# Altium PCB Quadcopter_FC.PcbDoc
Units mil, origin at the board's own origin, x right, y up, seen from the top; angles counter-clockwise.
Board outline 2052.28 x 989.83 mil, 4 copper layers (Top Layer, GND, POWER, Bottom Layer), stack 10.237 mil thick; 90 components, 54 nets, 269 pads, 186 vias.
Unrouted connection lines stored in the file: 79.
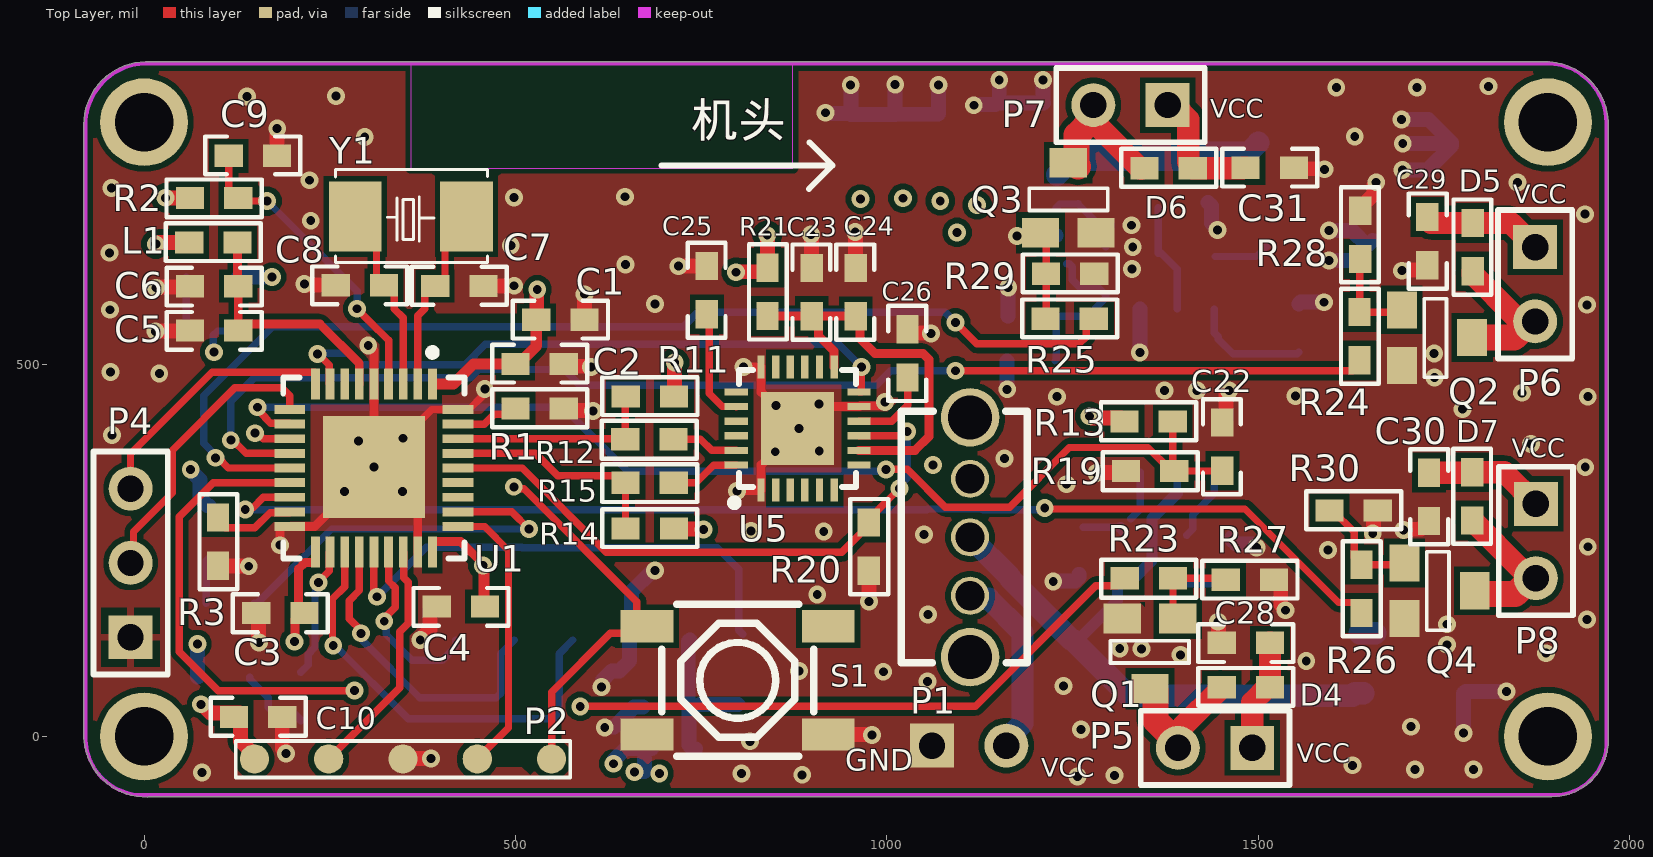
[diagram p0: Top Layer view]
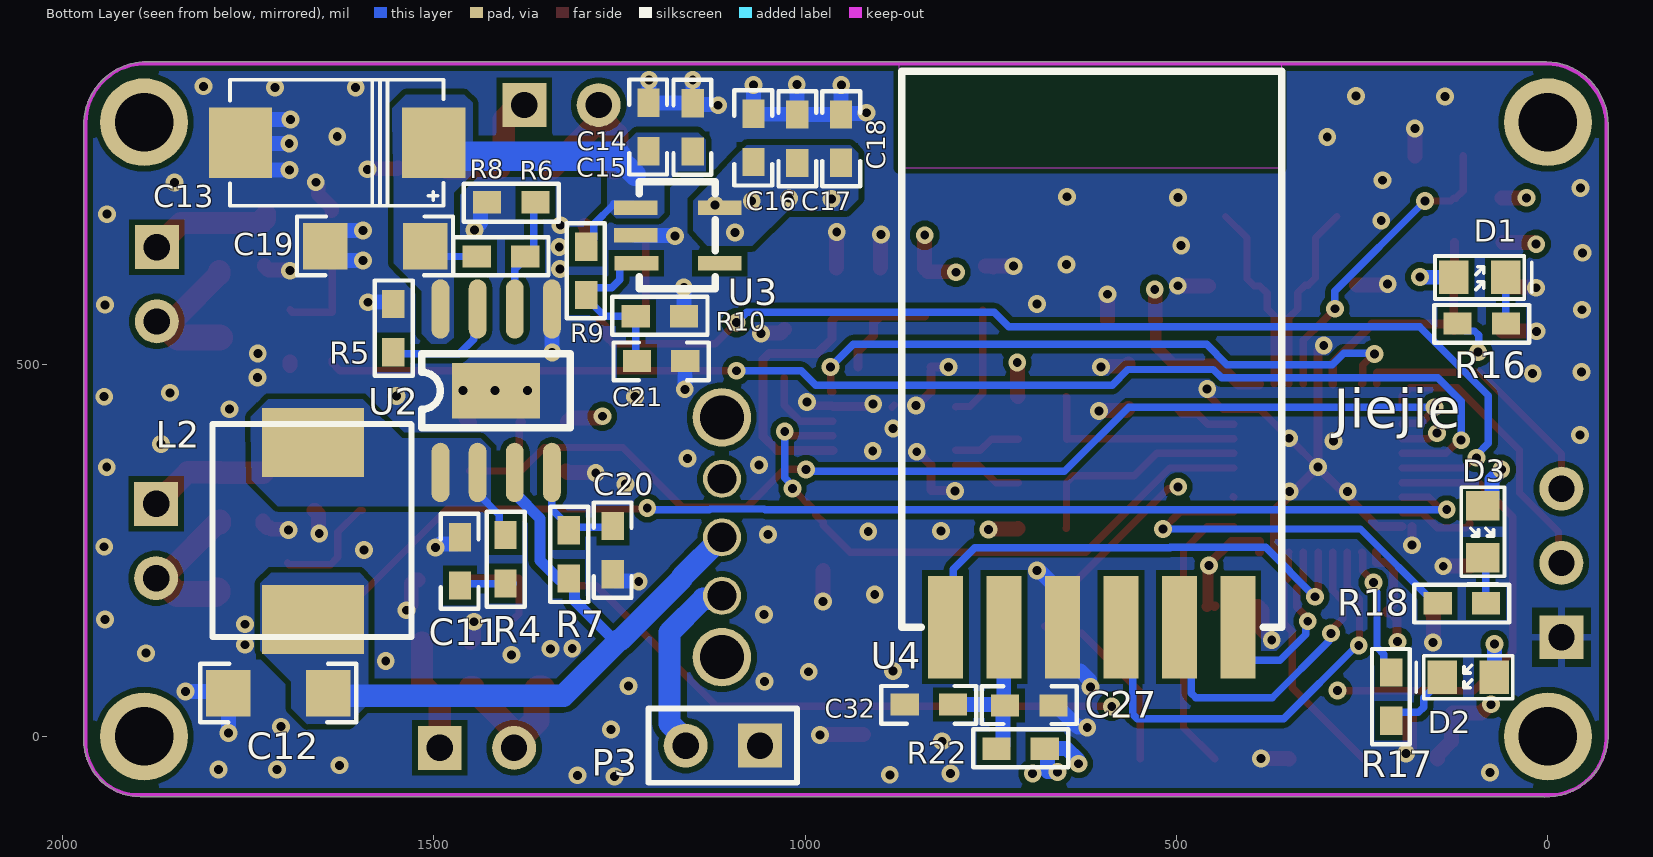
[diagram p1: Bottom Layer view, seen from below]
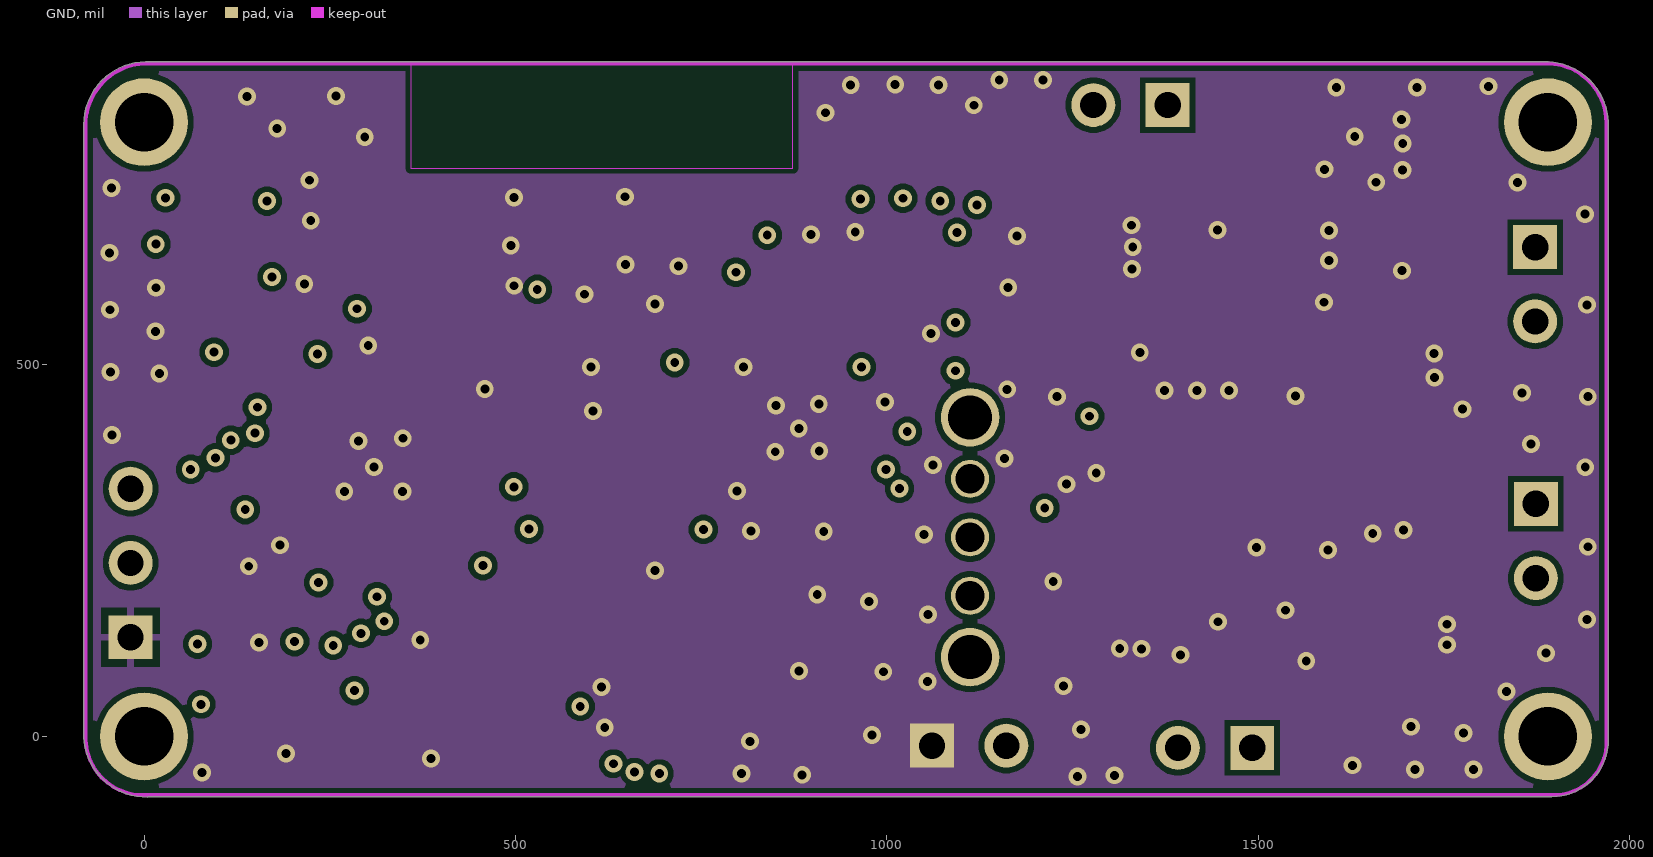
[diagram p2: GND]
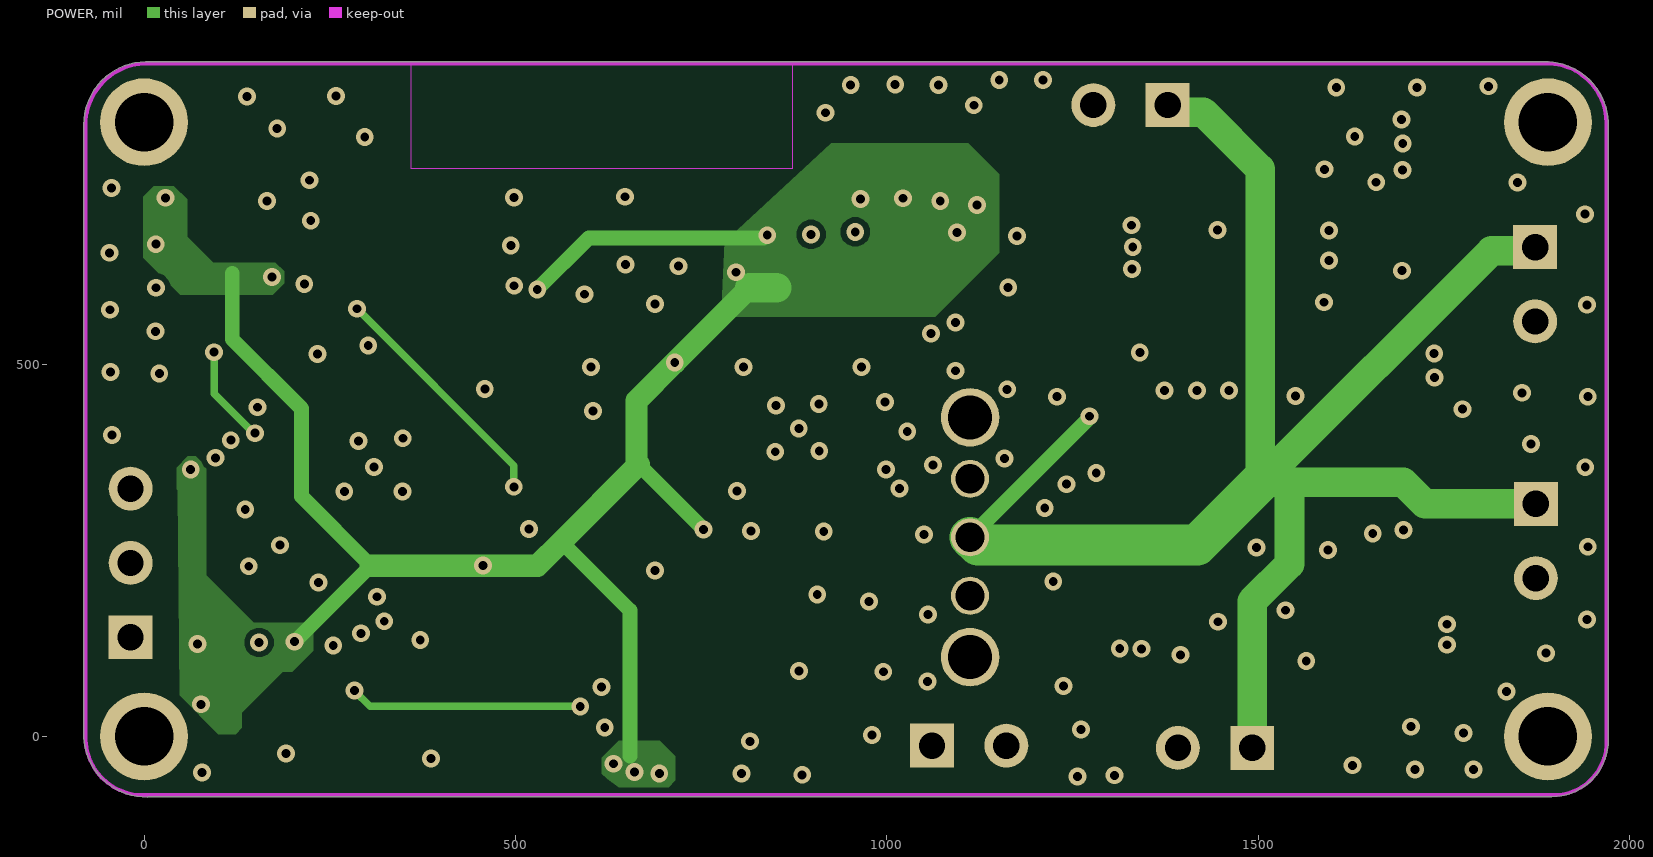
[diagram p3: POWER]

## Layer stack, top to bottom
Top Solder: solder mask 1.575, Solder Resist, Dk 3.5
Top Layer: signal copper 1.378
Dielectric 1: core 1.575, FR-4, Dk 4.2
GND: signal copper 1.378
Dielectric 2: core 1.575, FR-4, Dk 4.2
POWER: signal copper 1.378
Dielectric 3: core 1.575, FR-4, Dk 4.2
Bottom Layer: signal copper 1.378
Bottom Solder: solder mask 1.575, Solder Resist, Dk 3.5

## Board outline
-80.99,-0.47 cw(c-78.74,0.64) -81.26,0.64 -81.26,822.4 cw(c-78.74,822.4) -81.06,823.37 cw(c3.51,823.65) 2.02,908.21 cw(c2.06,905.7) 3.01,908.03 1889.19,908.03 cw(c1889.19,905.51) 1889.79,907.95 cw(c1886.32,823.45) 1970.81,827.2 cw(c1968.5,826.2) 1971.02,826.2 1971.02,-3.71 ccw(c1894.31,-4.55) 1971.02,-3.71 cw(c1894.31,-4.55) 1971.02,-4.55 cw(c1894.31,-4.55) 1895.15,-81.26 cw(c1895.12,-78.74) 1895.12,-81.26 6.06,-81.26 cw(c4.77,-79.1) 4.8,-81.61 cw(c3.51,2.95)

## Design rules (kind name [scope] priority, off if disabled: settings)
Clearance PVCC [InNet('PVCC') vs InNet('GND-WAVE')] p1: gap=20 ignorepadtopadclearanceinfootprint=FALSE except(0: Arc-Hole Track-Hole SMDPad-Hole THPad-Hole Via-Hole Fill-Hole Poly-Hole Region-Hole Text-Hole)
Clearance [All] p2: gap=7.5 ignorepadtopadclearanceinfootprint=FALSE except(0: Arc-Hole Track-Hole SMDPad-Hole THPad-Hole Via-Hole Fill-Hole Poly-Hole Region-Hole Text-Hole)
ComponentClearance [All] p1: gap=6 collisioncheckmode=3 verticalgap=5 showdistances=FALSE
HoleSize [All] p1: absolutevalues=TRUE maxlimit=500 minlimit=1 maxpercent=80.000 minpercent=20.000
MinimumSolderMaskSliver [All] p1: minsoldermaskwidth=0
PlaneClearance [All] p1: clearance=10
PolygonConnect Via [IsVia] p1: connectstyle=Direct reliefconductorwidth=10 reliefentries=4 polygonreliefangle="90 Angle" airgapwidth=10
PolygonConnect [All] p2: thpad.connectstyle=Relief thpad.reliefconductorwidth=10 thpad.reliefentries=4 thpad.polygonreliefangle="90 Angle" thpad.airgapwidth=10 smdpad.connectstyle=Direct smdpad.reliefconductorwidth=10 smdpad.reliefentries=4 smdpad.polygonreliefangle="90 Angle" smdpad.airgapwidth=10 via.connectstyle=Relief via.reliefconductorwidth=10 via.reliefentries=4 via.polygonreliefangle="90 Angle" via.airgapwidth=10
RoutingVias [All] p1: holewidth=12 width=24 viastyle="Through Hole" minholewidth=12 minwidth=24 maxholewidth=500 maxwidth=1000
ShortCircuit [All] p1: allowed=TRUE
SilkToSilkClearance [All] p1: silktosilkclearance=0
SilkToSolderMaskClearance [IsPad] p1: minsilkscreentomaskgap=0 clearancetoexposedcopper=TRUE
SolderMaskExpansion [All] p1: expansion=4 istentingtop=FALSE
Width [All] p1: maxlimit=100 minlimit=9 preferedwidth=10 minimp=50.000000 maximp=50.000000 favimp=50.000000
23 further rules are at their usual default settings.

## Classes and differential pairs
component class MCU: C1 C2 C3 C4 C5 C6 C7 C8 C9 C10 C11 C12 C13 C14 C15 C16 C17 C18 C19 C20 C21 L1 L2 P1 P2 P3 R1 R2 R3 R4 R5 R6 R7 R8 R9 R10 S1 U1 U2 U3 v Y1
component class Module: C22 C23 C24 C25 C26 C27 C28 C29 C30 C31 C32 D1 D2 D3 D4 D5 D6 D7 P4 P5 P6 P7 P8 Q1 Q2 Q3 Q4 R11 R12 R13 R14 R15 R16 R17 R18 R19 R20 R21 R22 R23 R24 R25 R26 R27 R28 R29 R30 U4 U5

## Components (designator, comment, footprint, x,y, rotation, side; value= is the part's Value field where it differs from the comment)
C1 "4.7μF" 0603C 560.5,560.7 r180 top
C2 "0.1μF" 0603C 532.5,501.4 r180 top
C3 "0.1μF" 0603C 183.39,166.16 r0 top
C4 "0.1μF" 0603C 426.6,174.8 r0 top
C5 "1μF" 0603C 94.3,546.3 r0 top
C6 "0.01μF" 0603C 94.3,606.1 r0 top
C7 "20pF" 0603C 424.3,606.3 r180 top
C8 "20pF" 0603C 290.4,607.5 r0 top
C9 "0.1μF" 0603C 146.4,781.5 r180 top
C10 "0.1μF" 0603C 153.51,26.06 r180 top
C11 "470pF" 0603C 1464.6,235.6 r270 bottom
C12 "22μF" 1206C 1776.25,58 r180 bottom
C13 "100μF" D7343C 1499.9,799.1 r0 bottom
C14 "10μF" 0603C 1210.87,820.34 r270 bottom
C15 "470pF" 0603C 1151.16,819.86 r270 bottom
C16 "10μF" 0603C 1069.4,805.6 r270 bottom
C17 "10μF" 0603C 1010.7,804.5 r90 bottom
C18 "0.01μF" 0603C 951.7,804.6 r90 bottom
C19 "22μF" 1206C 1645.95,659.8 r180 bottom
C20 "1nF" 0603C 1258.7,250.8 r270 bottom
C21 "0.1μF" 0603C 1193.9,505.3 r180 bottom
C22 "0.1μF" 0603C 1451.5,390.1 r270 top
C23 "0.1μF" 0603C 898.8,598.2 r270 top
C24 "0.01μF" 0603C 958,598.1 r270 top
C25 "2.2nF" 0603C 757.6,600.7 r270 top
C26 "0.1μF" 0603C 1027.8,515.5 r270 top
C27 "10μF" 0603C 698.2,41.7 r0 bottom
C28 "10μF" 0603C 1483.2,126.1 r0 top
C29 "10μF" 0603C 1727.5,666.8 r90 top
C30 "10μF" 0603C 1729.6,322.5 r90 top
C31 "10μF" 0603C 1515.3,765.3 r180 top
C32 "0.1μF" 0603C 833.3,42.8 r180 bottom
D1 "红色LED" 0603LED 126.9,617.8 r180 bottom
D2 "绿色LED" 0603LED 72.3,79.6 r0 bottom
D3 "蓝色LED" 0603LED 87.5,310.4 r270 bottom
D4 "1n5819" 0603R 1483.2,66 r180 top
D5 "1n5819" 0603R 1788.6,658.7 r270 top
D6 "1n5819" 0603R 1379.3,765 r180 top
D7 "1n5819" 0603R 1788.1,323.1 r270 top
L1 "BEAD-220/100MHZ" 0603R 93.2,664.9 r180 top
L2 "3.3μH_5.5A_7*7*3" "7*7*3mm - 06030" 1662.3,157.51 r90 bottom
P1 "拨动开关直插-3P" switch-3P 1111.9,189.32 r90 top locked
P2 "贴片下载口" DOWNLOAD 548.5,-30.3 r180 top
P3 "Header 2" HDR1X2 1060.7,-12.4 r0 bottom
P4 "Header 3" HDR1X3 -18.2,133.5 r90 top
P5 "Header 2" HDR1X2 1491.7,-15.5 r180 top
P6 "Header 2" HDR1X2 1872.6,658.6 r270 top
P7 "Header 2" HDR1X2 1377.9,849.9 r180 top
P8 "Header 2" HDR1X2 1873.6,313 r270 top
Q1 "CJ2310" SOT23-3 1391.5,158.79 r180 top
Q2 "CJ2310" SOT23-3 1693.21,574.2 r270 top
Q3 "CJ2310" SOT23-3 1206.7,677.91 r0 top
Q4 "CJ2310" SOT23-3 1696.71,233.5 r270 top
R1 "10K ohm" 0603R 532.5,441.4 r180 top
R2 "10K ohm" 0603R 94.2,724.7 r0 top
R3 "10K ohm" 0603R 99.62,262.08 r90 top
R4 "4.7ohm" 0603R 1403.3,238.5 r90 bottom
R5 "56K ohm" 0603R 1554.3,549.7 r90 bottom
R6 "22Kohm" 0603R 1409.3,646 r0 bottom
R7 "10K ohm" 0603R 1318.1,244.9 r90 bottom
R8 "3K ohm" 0603R 1395.5,718.9 r180 bottom
R9 "10K ohm" 0603R 1294.6,626.7 r270 bottom
R10 "100K ohm" 0603R 1195.3,565.6 r0 bottom
R11 "4.7K ohm" 0603R 681,457.6 r180 top
R12 "0ohm" 0603R 680.2,399.9 r0 top
R13 "68K ohm" 0603R 1352.2,423.8 r180 top
R14 "4.7K ohm" 0603R 680.67,279.98 r180 top
R15 "0ohm" 0603R 680.6,341.6 r0 top
R16 "1Kohm" 0603R 89.1,555.7 r180 bottom
R17 "3Kohm" 0603R 210.8,53.6 r270 bottom
R18 "1Kohm" 0603R 115.9,179.3 r180 bottom
R19 "100K ohm" 0603R 1354.3,357.3 r0 top
R20 "10K ohm" 0603R 975.6,255.6 r90 top
R21 "0ohm" 0603R 839.3,598.3 r90 top
R22 "0ohm" 0603R 709.81,-16.54 r0 bottom
R23 "30 ohm" 0603R 1352.6,212.7 r0 top
R24 "30 ohm" 0603R 1636.2,538.7 r90 top
R25 "30 ohm" 0603R 1246,562.1 r180 top
R26 "30 ohm" 0603R 1638.8,198.7 r90 top
R27 "10K ohm" 0603R 1488.7,210.7 r180 top
R28 "10K ohm" 0603R 1637.2,675.1 r270 top
R29 "10K ohm" 0603R 1246.7,622.7 r180 top
R30 "10K ohm" 0603R 1628.3,304.1 r180 top
S1 "BX-TS-26-4416TT" SW-SMD_4P-L5.2-W5.2-P3.70-LS6.5 799.1,75.4 r180 top
U1 "STM32F103T8U6-36PIN" QFN-36N 309.38,361.3 r270 top
U2 "FP6276BXR-G1" "SO8 - FP6277" 1490.8,355.3 r90 bottom
U3 "TP2019-3.3YN5" SOT-23-5 1227.89,711.8 r270 bottom
U4 "GC2400-TC017 2.4G Module" "2.4G-Serial port" 811.05,147.13 r180 bottom locked
U5 "MPU6050" QFN24 879.66,414.48 r90 top locked
Y1 "XTAL_8MHz_5032" 5032 284.4,699.9 r0 top

## Footprints (in the part's own frame and the unit in brackets; to place one, negate y for a bottom-side part, rotate by r counter-clockwise, add the part's x,y. Pads: shape width x height; smd on the part's side, far side on the other; paste and mask are expansions set on the pad)
"2.4G-Serial port" [mm]
  rect 1.2x3.5 smd: 1(0,0) 2(2,0) 3(4,0) 4(6,0) 5(8,0) 6(10,0)
  silkscreen extent -1.5,0 11.5,19, body extent -1.5,0 11.5,19, height 1.5
"7*7*3mm - 06030" [mm]
  rect 2.35x3.5 smd: 1(0,0) 2(6.05,0)
  silkscreen extent -0.61,-3.37 6.68,3.44, body extent -0.64,-3.37 6.68,3.44, height 3
0603C [mil]
  rect 38x30 smd: 1(-32.5,0) 2(32.5,0)
  silkscreen extent -64,-26 64,25, body extent -35,-20 35,20, height 31
0603LED [mil]
  rect 40x45 smd: 1(0,0) 2(70,0)
  silkscreen extent -25,-29 105,29, body extent -28,-31 98,31, height 39
0603R [mil]
  rect 38x30 smd: 1(-32.5,0) 2(32.5,0)
  silkscreen extent -64,-26 64,25, body extent -35,-20 35,20, height 16
1206C [mm]
  rect 1.52x1.6 smd: 1(0,0) 2(3.42,0)
  silkscreen extent -0.97,-0.99 4.37,1.02, body extent -0.13,-0.89 3.68,0.89, height 2
5032 [mm]
  rect 1.8x2.4 smd: 1(0,0) 2(3.8,0)
  silkscreen extent -0.69,-1.57 4.51,1.6, body extent -0.69,-1.58 4.51,1.61, height 1.25
D7343C [mm]
  rect 2.16x2.41 smd: 1(0,0) 2(6.61,0)
  silkscreen extent -0.33,-2.15 6.97,2.15, body extent -0.35,-2.21 6.97,2.19, height 2.9
DOWNLOAD [mm]
  round 1 smd: 1(0,0) 2(2.54,0) 3(5.08,0) 4(7.62,0) 5(10.16,0)
  silkscreen extent -0.64,-0.61 10.79,0.64
HDR1X2 [mm] "Connector; Header; 2 Position"
  rect 1.5x1.5 hole 0.9: 1(0,0)
  round 1.5 hole 0.9: 2(2.54,0)
  silkscreen extent -1.27,-1.27 3.81,1.27
HDR1X3 [mm] "Connector; Header; 3 Position"
  rect 1.5x1.5 hole 0.9: 1(0,0)
  round 1.5 hole 0.9: 2(2.54,0) 3(5.08,0)
  silkscreen extent -1.27,-1.27 6.35,1.27
QFN24 [mm]
  rect 0.8x0.25 smd: 1(-2.101,1.25) 2(-2.101,0.75) 3(-2.101,0.25) 4(-2.101,-0.25) 5(-2.101,-0.75) 6(-2.101,-1.25) 13(2.101,-1.25) 14(2.101,-0.75) 15(2.101,-0.25) 16(2.101,0.25) 17(2.101,0.75) 18(2.101,1.25)
  rect 0.25x0.8 smd: 7(-1.25,-2.101) 8(-0.75,-2.101) 9(-0.25,-2.101) 10(0.25,-2.101) 11(0.75,-2.101) 12(1.25,-2.101) 19(1.25,2.101) 20(0.75,2.101) 21(0.25,2.101) 22(-0.25,2.101) 23(-0.75,2.101) 24(-1.25,2.101)
  rect 2.5x2.5 smd: 25(0,0)
  silkscreen extent -2.66,-2 2,2.28, body extent -2,-2 2,2, height 1.3
QFN-36N [mm]
  rect 1.05x0.3 smd: 1(-2.875,2) 2(-2.875,1.5) 3(-2.875,1) 4(-2.875,0.5) 5(-2.875,0) 6(-2.875,-0.5) 7(-2.875,-1) 8(-2.875,-1.5) 9(-2.875,-2) 19(2.875,-2) 20(2.875,-1.5) 21(2.875,-1) 22(2.875,-0.5) 23(2.875,0) 24(2.875,0.5) 25(2.875,1) 26(2.875,1.5) 27(2.875,2)
  rect 0.3x1.05 smd: 10(-2,-2.875) 11(-1.5,-2.875) 12(-1,-2.875) 13(-0.5,-2.875) 14(0,-2.875) 15(0.5,-2.875) 16(1,-2.875) 17(1.5,-2.875) 18(2,-2.875) 28(2,2.875) 29(1.5,2.875) 30(1,2.875) 31(0.5,2.875) 32(0,2.875) 33(-0.5,2.875) 34(-1,2.875) 35(-1.5,2.875) 36(-2,2.875)
  silkscreen extent -4.07,-3.1 3.1,3.1
"SO8 - FP6277" [mil]
  oval 80x24 smd: 1(0,0) 2(0,-50) 3(0,-100) 4(0,-150) 5(220,-150) 6(220,-100) 7(220,-50) 8(220,0)
  rect 74.8x118.11 smd: 9(109.8,-74.7)
  silkscreen extent 60,-175 160,25, body extent 45,-175 175,25, height 47
SOT23-3 [mil]
  rect 50x40 smd: 1(0,0) 2(74.8,0) 3(37.4,94.49)
  silkscreen extent -15,30 91,60, body extent -25,24 99,72, height 37
SOT-23-5 [mm]
  rect 0.5x1.5 smd: 1(0,0) 2(0.95,0) 3(1.9,0.02) 4(1.9,2.87) 5(0,2.87)
  silkscreen extent -0.88,0.12 2.77,2.72, body extent -0.7,0.2 2.6,2.6, height 1
SW-SMD_4P-L5.2-W5.2-P3.70-LS6.5 [mm]
  rect 1.8x1.1 smd: 1(-3.1,1.85) 2(3.1,1.85) 3(-3.1,-1.85) 4(3.1,-1.85)
  silkscreen extent -2.6,-2.6 2.6,2.6
switch-3P [mm]
  round 2 hole 1.5: 0(-2.1,0) 0(6.1,0)
  round 1.3 hole 1: 1(0,0) 2(2,0) 3(4,0)
  silkscreen extent -2.29,-1.95 6.31,2.35, body extent -2.29,-1.95 6.31,2.35, height 6.7

## Part data
C1 C2 C3 C4 C5 C6 C9 C10 C18 C22 C23 C24 C26 C32: library part Cap_0.1μF_50V_0603, "0.1μF_50V,X7R,±5%", 制造商=muRata, 单位=PCS, 物料名称=贴片陶瓷电容, 物料型号=GRM188R71H104JA93D, 物料编码=TCC0087, 物料规格=0.1μF_50V,X7R,±5%
C7 C8: library part Cap_20pF_50V_0603, "20pF_50V,CH,±5%", 制造商=muRata, 单位=PCS, 物料名称=贴片陶瓷电容, 物料型号=GRM1882C1H200JA01D, 物料编码=TCC0036, 物料规格=20pF_50V,CH,±5%
C11: library part Cap_2.2nF_50V_0603, "2.2nF_50V,X7R,10%", 制造商=muRata, 单位=PCS, 物料名称=贴片陶瓷电容, 物料型号=NA, 物料编码=NA, 物料规格=2.2nF_50V,X7R,10%
C12 C19: library part Cap_22μF_35V_1206, "22μF_35V,20%", 制造商=TDK, 单位=PCS, 物料名称=贴片陶瓷电容, 物料型号=C3216JB1V226M160AC, 物料编码=NA, 物料规格=22μF_35V,20%
C13: library part Cap_100μF_16V_D7343, "100μF_16V", 制造商=AVX, 单位=PCS, 物料名称=钽电容, 物料型号=NA, 物料编码=NA, 物料规格=100μF_16V
C14 C15 C16 C20 C21: library part Cap_1μF_50V_0603, "1μF_50V,X5R,±10%", 制造商=muRata, 单位=PCS, 物料名称=贴片陶瓷电容, 物料型号=GRM188R61H105KAALD, 物料编码=TCC0040, 物料规格=1μF_50V,X5R,±10%
  C20: ComponentLink1Description="New link"
C17 C25 C27: library part Cap_10μF_35V_0603, "10μF_35V,X5R,20%", 制造商=muRata, 单位=PCS, 物料名称=贴片陶瓷电容, 物料型号=GRM188R6YA106MA73D, 物料编码=TCC0071, 物料规格=10μF_35V,20%
C28 C29 C30 C31: library part Cap_4.7μF_50V_0603, "4.7μF_50V,±10%", 制造商=TDK, 单位=PCS, 物料名称=贴片陶瓷电容, 物料型号=NA, 物料编码=NA, 物料规格=4.7μF_50V,±10%
D1 D2: library part 蓝色LED, "蓝色LED", 制造商=VISHAY, 单位=PCS, 物料名称=LED(蓝色）, 物料型号=TLMB1100, 物料编码=TRG0035, 物料规格=LED(蓝色）
D4 D5 D6 D7: library part 1n5819wt_c5451630, "二极管配置:独立式;正向压降(Vf):600mV@200mA;直流反向耐压(Vr):40V;整流电流:350mA;", Current - Rectified=350mA, JLCPCB Part Class="Extended Part", LCSC Part Name="电压:40V 电流:350mA", Manufacturer="HXY MOSFET(华轩阳电子)", ManufacturerPart=1N5819WT, Reverse Leakage Current (Ir)=5uA@30V, Voltage - DC Reverse(Vr)=40V, Voltage - Forward(Vf@If)=600mV@200mA, AddInBom=yes, ConvertToPcb=yes, Datasheet=https://item.szlcsc.com/datasheet/1N5819WT/6355373.html, Diode Configuration=独立式, FootprintName=SOD-523_L1.2-W0.8-LS1.6-RD, ModelId=8f56a03db567494d8f4c9d12aa52a741, ModelName=SOD-523_L1.2-W0.8-H0.7-LS1.6, ModelTransform=62.992,31.496,0,180,0,0,0,0,0, Supplier=LCSC, Supplier Footprint=SOD-523, SupplierPart=C5451630, Symbol=1N5819WT_C5451630
L1: library part BEAD-220/100MHZ_0603, 制造商=TDK, 单位=PCS, 物料名称=磁珠, 物料型号=MMZ1608B221CTAH0, 物料编码=TCZ0006, 物料规格=BEAD-220/100MHZ
L2: library part 4.7μH_5.5A_7*7*3, "4.7μH_5.5A_", 制造商=台湾奇力新, 单位=PCS, 物料名称=功率电感, 物料型号=MHCC10040-4R7M-R8_06030, 物料编码=NA, 物料规格=4.7μH_5.5A_7*7*3
P2: library part 微型下载口, "微型下载口", 制造商=NA, 单位=PCS, 物料名称=微型下载口, 物料型号=微型下载口, 物料编码=NA, 物料规格=微型下载口
P3 P5 P6 P7 P8: "Header, 2-Pin", LatestRevisionDate=17-Jul-2002, LatestRevisionNote="Re-released for DXP Platform.", Publisher="Altium Limited"
P4: "Header, 3-Pin", LatestRevisionDate=17-Jul-2002, LatestRevisionNote="Re-released for DXP Platform.", Publisher="Altium Limited"
R1 R2 R3 R7 R9 R10 R20 R27 R28 R29 R30: library part "Res_10K ohm_0603", "10K ohm,1%", 制造商=YAGEO, 单位=PCS, 物料名称=贴片电阻, 物料型号=RC0603FR-0710KL, 物料编码=TRS0020, 物料规格="10K ohm,1%"
R4 R21 R22: library part "Res_24K ohm_0603", "24K ohm,1%", 制造商=YAGEO, 单位=PCS, 物料名称=贴片电阻, 物料型号=RC0603FR-0724KL, 物料编码=NA, 物料规格="24K ohm,1%"
R5: library part "Res_30K ohm_0603", "30K ohm,1%", 制造商=YAGEO, 单位=PCS, 物料名称=贴片电阻, 物料型号=RC0603FR-0730KL, 物料编码=TRS0028, 物料规格="30K ohm,1%"
R6: library part Res_100Kohm_0603, "100K ohm_5%", 制造商=YAGEO, 单位=PCS, 物料名称=贴片电阻, 物料型号=RC0603JR-07100K, 物料编码=TRS0032, 物料规格="100K ohm_5%"
R8: library part "Res_13K ohm_0603", "13K ohm,1%", 制造商=YAGEO, 单位=PCS, 物料名称=贴片电阻, 物料规格="13K ohm,1%"
R11 R14: library part "Res_4.7K ohm_0603", "4.7K ohm,1%", 制造商=YAGEO, 单位=PCS, 物料名称=贴片电阻, 物料型号=AA0603FR-074K7L, 物料规格="4.7K ohm,1%"
R12 R15: library part Res_120ohm_0603, "120 ohm_5%", 制造商=YAGEO, 单位=PCS, 物料名称=贴片电阻, 物料型号=NA, 物料编码=NA, 物料规格="120 ohm_5%"
R13: library part "Res_200K ohm_0603", "200K ohm,1%", 制造商=YAGEO, 单位=PCS, 物料名称=贴片电阻, 物料型号=RC0603FR-07200KL, 物料编码=TRS0060, 物料规格="200K ohm,1%"
R16 R17 R18: library part Res_510ohm_0603, "510 ohm,1%", 制造商=YAGEO, 单位=PCS, 物料名称=贴片电阻, 物料规格="510 ohm,1%"
R19: library part "Res_68K ohm_0603", "68K ohm,1%", 制造商=YAGEO, 单位=PCS, 物料名称=贴片电阻, 物料型号=RC0603FR-0768KL, 物料编码=NA, 物料规格="68K ohm,1%"
R23 R24 R25 R26: library part Res_100ohm_0603, "100 ohm_5%", 制造商=YAGEO, 单位=PCS, 物料名称=贴片电阻, 物料型号=RC0603JR-07100R, 物料编码=TRS0010, 物料规格="100 ohm_5%"
S1: Actuator/Cap Color=金色, Contact Current=50mA, Insulation Resistance=100MΩ, JLCPCB Part Class=扩展库, LCSC Part Name=4x4x1.6铜头开关, Manufacturer=Bossie(博锡), Operating Force=260gf, Operating Temperature=-30℃~+80℃, Voltage Rating (AC)=250V, Voltage Rating (DC)=12V, Actuator Style=圆形按钮, Add into BOM=yes, Circuit=单刀单掷, Convert to PCB=yes, Datasheet=https://atta.szlcsc.com/upload/public/pdf/source/20231017/1BCB02B7989804C2A116E52C6BA77509.pdf, Device=BX-TS-26-4416TT, Manufacturer Part=BX-TS-26-4416TT, Mechanical Life=10万次, Mounting Style=立贴, Pin Style=鸥翼型, Strike Gundam=不带, Supplier=LCSC, Supplier Footprint=SMD-4P,4x4mm, Supplier Part=C18078109, Switch Height=1.6mm, Switch Length=4mm, Switch Width=4mm, Symbol=BX-TS-26-4416TT
U2: library part FP6277, "FP6277", 制造商=台湾远翔, 单位=PCS, 物料名称=升压芯片, 物料型号=FP6277, 物料编码=NA, 物料规格=FP6277
U4: library part 2.4G_转串口, "2.4G_转串口", 制造商=NA, 单位=PCS, 物料名称=2.4G_转串口, 物料型号=2.4G_转串口, 物料编码=NA, 物料规格=2.4G_转串口
Y1: "XTAL_8MHz", 制造商=TAITIEN, 单位=PCS, 物料名称=晶振, 物料型号=XIHCCCNANF-8.000, 物料编码=NA, 物料规格=8MHz
D3: 制造商=VISHAY, 单位=PCS, 物料名称=LED(蓝色）, 物料型号=TLMB1100, 物料编码=TRG0035, 物料规格=LED(蓝色）
P1: 制造商=NA, 单位=PCS, 物料名称=拨动开关直插-3P, 物料型号=拨动开关直插-3P, 物料编码=NA, 物料规格=拨动开关直插-3P
Q1 Q2 Q3 Q4: 制造商=JSCJ, 单位=PCS, 物料名称=NMOS, 物料型号=CJ2310, 物料编码=NA, 物料规格=CJ2310
U1: 制造商=ST, 单位=PCS, 物料名称=单片机, 物料型号=STM32F103T8U6-36PIN, 物料编码=NA, 物料规格=STM32F103T8U6-36PIN
U3: 制造商="Tech Public 台舟电子", 单位=PCS, 物料名称=3.3v电源, 物料型号=TP2019-3.3YN5, 物料编码=NA, 物料规格=TP2019-3.3YN5
U5: 制造商=InvenSense, 单位=PCS, 物料名称=陀螺仪, 物料型号=MPU6050, 物料编码=NA, 物料规格=MPU6050

## Free pads (board coordinates)
  round 118.11 hole 78.74: 0(0,0) 0(0,826.77) 0(1889.76,0) 0(1889.76,826.77)
  rect 137.8x137.8 smd: ""(309.55,362.59)

## Via types
v1: diameter 24, hole 12, Top Layer to Bottom Layer, tented both sides, 186 vias

## Nets (pads, with @x,y where several pads share a name; then routed paths per layer and width w, separated by ;. In a path a pad name is that pad's centre, name@x,y a point inside that pad or via, vN(x,y) a via of type N, cw(c..) or ccw(c..) an arc to the next point about the centre after c; other vN are vias at no path point)
ADC: C22.2 R13.1 R19.2 U1.11 | length 1526.8
  Top Layer w10: v1(152.6,443.1) 152.6,439.87 163.03,429.44 163.03,428.96 170.72,421.26 195.29,421.26 U1.11 ; v1(998.7,359.4) 1027.7,359.4 1078.39,308.71 1165.21,308.71 1245.45,388.95 1351.15,388.95 1380.7,359.4 R19.2@1384.7,359.4 ; R13.1@1380.7,423.8 R13.1 R19.2@1384.7,359.4 ; C22.2 1451.2,357.3 R19.2 R19.2@1384.7,359.4
  Bottom Layer w10: v1(152.6,443.1) 564.45,443.1 650.75,356.8 996.1,356.8 v1(998.7,359.4)
BAT_IN: P1.1 P3.2 | length 252.3
  Bottom Layer w30: P1.1 1115.95,185.27 1137.03,185.27 1182.5,139.8 1182.5,17.26 1160.7,-4.54 P3.2
BOOT0: R1.2 U1.35 | length 86.1
  Top Layer w10: U1.35 458.16,420.36 471.5,433.7 492.3,433.7 R1.2
BOOT1: R3.2 U1.17 | length 103.5
  Top Layer w10: R3.2@105.1,287.02 105.1,285.35 109.62,280.84 149.08,280.84 169.59,301.34 195.29,301.34 U1.17
CE: U1.24 U4.6 | length 246.7
  Top Layer w10: v1(323.3,155) 323.3,158.79 338.2,173.69 338.2,200.08 329.07,209.21 U1.24
  Bottom Layer w10: v1(323.3,155) 325.98,152.32 325.98,137.12 360.7,102.4 401.16,102.4 419.78,121.02 U4.6@419.78,129.8
GND: C1.1 C2.1 C3.1 C4.1 C5.1 C6.1 C7.1 C8.1 C9.1 C10.1 C11.1 C12.1 C13.2 C14.1 C15.1 C16.1 C17.2 C18.2 C19.1 C20.2 C21.2 C22.1 C23.1 C24.1 C25.1 C26.1 C27.1 C28.1 C29.1 C30.1 C31.1 C32.1 P2.3 P3.1 P4.1 pad. Q1.2 Q2.2 Q3.2 Q4.2 R1.1 R3.1 R5.2 R8.1 R10.1 R19.1 R20.1 R27.1 R28.1 R29.1 R30.1 S1.1 S1.2 U1.5 U1.18 U1.26 U1.36 U2.5 U2.9 U3.2 U4.3 U5.1 U5.11 U5.18 U5.25 | length 3672.6
  Top Layer w10: v1(309.55,362.59) v1(348.27,401.31) 387,440.04 U1.36 437.34,440.04 456.02,458.72 456.02,464.92 v1(458.7,467.6) ; U5.25@879.8,446.1 U5.25@882.99,442.91
  Top Layer w12: v1(183,257.4) U1.18@183,282.47 ; U1.18 229.52,282.56 pad.@273.16,326.21 ; v1(269.53,329.84) pad.@273.16,326.21 ; v1(301.73,526.02) 302.83,526.02 309.38,519.46 U1.5 309.48,474.4 309.48,449.56 309.55,449.49 v1(309.55,362.59) ; v1(347.7,329.84) pad.@345,327.14 ; U1.26 368.44,303.7 pad.@345,327.14 ; v1(798.17,330.5) 798.8,331.13 829.82,331.13 U5.1 830.44,365.26 848.38,383.2 v1(849.67,383.2) ; v1(806.8,497.42) 806.91,497.31 830.34,497.31 U5.18 ; U5.18@830.44,491.98 830.44,463.69 848.63,445.5 v1(850.87,445.5) ; v1(908.27,447.3) 911.57,444 U5.11 963.46,445.08 989.38,445.08 994.34,450.05 v1(997.59,450.05) ; pad.@273.16,326.21 v1(309.55,362.59) ; v1(309.55,362.59) pad.@345,327.14
  Top Layer w20: v1(15.5,545.3) 16,545.8 61.3,545.8 C5.1 ; v1(16.2,604) 16.97,604.77 60.47,604.77 C6.1 ; R3.1@104.62,230.64 104.62,229.32 140.58,229.32 v1(140.84,229.06) ; v1(154.9,126.4) 154.13,127.17 154.13,163.56 C3.1@155.75,165.17 ; C9.1 179.02,781.62 179.02,818.4 v1(179.15,818.52) ; C10.1 186.01,-16.72 191.2,-21.92 v1(191.2,-23) ; v1(215.7,609) 216.78,609 218.28,607.5 C8.1 ; P2.3 348.85,-29.95 386.05,-29.95 v1(386.4,-29.6) ; v1(371.76,129.6) 371.76,130.68 385.1,144.02 385.1,169.8 390.1,174.8 C4.1 ; C7.1 456.95,606.45 498.03,606.45 v1(498.18,606.6) ; R1.1 567.63,438.77 603.43,438.77 v1(604.2,438) ; C2.1 568.22,498.18 600.93,498.18 v1(601.7,497.42) ; v1(592.8,595.2) 592.9,595.1 592.9,560.8 C1.1 ; v1@719.3,633.1 C25.1@757.5,633.1 ; C25.1@746.5,631.7 C25.1@746.6,631.8 ; v1(897.8,675.7) 898.3,675.2 898.3,631.2 C23.1 ; S1.1 921.39,2.32 979.81,2.32 v1(980.05,2.08) ; v1(957.3,679.2) 957.65,678.85 957.65,630.95 C24.1 ; R20.1 975.71,222.99 975.71,181.84 v1(975.82,181.73) ; C26.1 1032.76,543.04 1058.53,543.04 v1(1059.29,542.28) ; v1(1281.8,354.5) 1282.57,355.27 1319.77,355.27 R19.1 ; Q3.2@1294.5,673.01 1294.5,685.91 Q3.2@1296.5,687.91 ; v1(1445.7,154.3) 1446.47,153.53 1446.47,130.33 C28.1 ; C22.1 1456.5,427.6 1456.5,460.82 1460.4,464.72 v1(1460.4,465.8) ; R27.1 1525.2,210.7 1530.2,205.7 1530.2,177.34 1536.3,171.24 v1(1536.3,169.8) ; C31.1 1548.93,764.17 1588.13,764.17 v1(1588.9,763.4) ; R28.1 1637.2,711.6 1655.39,729.79 1655.39,741.71 1658.6,744.92 v1(1658.6,746) ; v1(1654,273) 1654.77,273.77 1654.77,299.1 1659.77,304.1 R30.1 ; Q2.2 Q2.2@1693.21,504.4 ; v1(1693.4,626.9) 1694.17,627.67 1722.5,627.67 1727.5,632.67 C29.1 ; v1(1695.3,278) 1696.07,278.77 1718.37,278.77 1720.6,281 1724.6,281 1729.6,286 C30.1
  Bottom Layer w10: R8.1 R8.1@1432,718.9
  Bottom Layer w20: v1(615.9,66.5) 616.67,67.27 616.67,75.28 629.62,88.23 639.95,88.23 653.57,101.85 U4.3 ; v1(620.15,11.94) 620.92,12.71 632.71,12.71 659.4,39.4 C27.1@671.46,39.4 ; U4.3@656,147.13 656,194.84 683.7,222.53 686.96,222.53 v1(687.72,223.3) ; v1(917.3,839.5) 918.07,838.73 950.07,838.73 C18.2 ; v1(951.2,876.9) 951.7,876.4 C18.2 ; C17.2 1010.65,837.05 951.75,837.05 C18.2 ; v1(1011.1,877.4) 1010.9,877.2 1010.9,837.2 1011.25,837.55 1068.85,837.55 C16.1 C16.1 1069.45,876.85 v1(1069.5,876.9) ; v1(1116.95,849.64) 1117.72,850.4 1146.16,850.4 C15.1@1151.2,855.44 ; v1(1151.2,883.8) C15.1@1151.2,855.44 ; C21.2 1161.64,505.06 1161.64,467.48 v1(1161.88,467.24) ; R10.1 1163,565.8 1163,604.1 v1(1163.2,604.3) ; v1(1175.2,673.8) 1175.64,674.24 1227.73,674.24 U3.2 ; C14.1@1210.17,855.77 v1(1210.17,883.8) ; C14.1 1210.63,852.6 1154.03,852.6 C15.1@1151.2,855.44 ; v1(1223.9,208.4) 1224.98,208.4 1225.88,209.3 1253.7,209.3 1258.7,214.3 C20.2 ; v1(1340.4,516.7) 1340.6,516.9 1340.6,575.1 U2.5 ; R8.1@1432,718.9 1437,713.9 1437,690.98 1445.04,682.94 v1(1445.04,681.86) ; C11.1 1464.6,264.1 1469.6,259.1 1491.62,259.1 1496.32,254.4 v1(1497.4,254.4) ; R5.2 1556.9,584.8 1586.7,584.8 1587.1,584.4 v1(1588.2,584.4) ; v1(1594.9,640.5) 1626.65,640.5 C19.1 ; v1(1595.2,681) 1626.02,681 1645.95,661.08 C19.1 ; C19.1@1653.95,667.8 C19.1 ; v1(1692.7,830.6) 1728.64,830.6 C13.2 ; v1(1693.9,762.6) 1727.62,762.6 1760.14,795.12 C13.2 ; v1(1694.4,798.1) 1759.14,798.1 C13.2 ; v1(1776.3,4.7) C12.1@1776.27,57.97 ; C12.1 1778.75,60.5 v1(1834,60.5)
  other v1: 1256.3,-54 1306.2,-52.4 885.9,-51.7 804.4,-49.9 77.9,-48.6 1711,-44.5 1789.6,-44.6 1626.5,-38.9 815.8,-6.6 1261.4,9.2 1705.3,13.1 1237.5,67.7 1054.8,73.7 995.1,87 881.6,88.1 1564.4,101.7 1395.1,109.8 1887.1,112 1342.5,117.9 1313.4,118.5 1754.1,123.4 1753.8,151 1942.6,157.4 1055.15,163.92 906.15,191.08 1593.59,250.84 1943.5,255.3 1049.8,271.7 914.9,275.9 816.8,276.5 1241.8,339.5 1940,362.4 1061.9,365.5 1158.3,374.1 908.87,384.4 1867.19,393.55 288.6,397.8 -43,405.9 881.35,414.59 1774.8,440.5 1228.9,457.3 1943.5,457.3 1549.9,458.4 1854.8,462.5 1373.8,465.8 1417.3,465.8 1736.9,483.3 20.5,488.7 -45.1,490.4 1736.7,515.6 -45.8,574.3 1942.6,581 687.7,582.2 1330,629.4 719.2,633 648,635.1 -46.6,651 1330.9,658.8 493.7,660.8 1329.4,688.1 224.4,694.2 1939.9,703 498,725.3 647.6,726.5 -43.68,738.42 1848.8,745.5 222.5,748.7 297.1,807 1629.7,807.7 138.61,861.58 258.2,861.9 1604.9,873.3 1713.6,873.3 1809.8,875.1
LED-B: R18.1 U1.29 | length 516.2
  Top Layer w10: U1.29 495.05,302.24 v1(518.15,279.14)
  Bottom Layer w10: R18.1 152.4,179.3 252.24,279.14 v1(518.15,279.14)
LED-G: R17.1 U1.20 | length 178.4
  Top Layer w10: v1(235,207.1) 235,208.22 249.42,222.64 249.42,247.21 U1.20
  Bottom Layer w10: R17.1 220.8,96.1 220.8,110.5 230.1,119.8 230.1,194.24 232.32,196.46 232.32,204.42 v1(235,207.1)
LED-R: R16.1 U1.12 | length 241.3
  Top Layer w10: v1(149.17,408.17) 152.96,408.17 160.45,400.67 U1.12
  GND w10: v1(94.3,517.23) v1@94.7,516.83 ; v1@147.52,408.17 v1(149.17,408.17)
  POWER w10: v1@94.7,516.83 94.7,460.99 v1@147.52,408.17
  Bottom Layer w10: v1(94.3,517.23) 92.94,518.58 92.94,539.84 98.8,545.7 111.6,545.7 R16.1
MPU_AD0: R20.2 U1.32 U5.9 | length 831.3
  Top Layer w10: U1.32 508.9,361.3 622.4,247.8 939.3,247.8 975.6,284.1 R20.2 985.6,298.1 985.6,302.39 v1(1016.91,333.7) ; U5.9 1020.3,404.63 1026.2,410.53 v1(1027.37,410.53)
  Bottom Layer w10: v1(1016.91,333.7) 1016.91,337.48 1027.37,347.94 v1(1027.37,410.53) v1@1028.03,409.87
MPU_INT: U1.8 U5.12 | length 847.4
  Top Layer w10: v1(233.5,514.66) 234.73,514.66 249.42,499.96 249.42,475.4 U1.8 ; U5.12 965.53,463.69 965.61,463.77 v1(965.61,497.42)
  Bottom Layer w10: v1(233.5,514.66) 234.57,515.73 275.01,515.73 290.25,500.5 432.2,500.5 459.4,527.7 935.33,527.7 v1(965.61,497.42)
NetC5_2: C5.2 C6.2 L1.1 U1.6 | length 334.9
  Top Layer w12: L1.1 125.7,607.2 C6.2 C5.2 135.4,554.9 236.79,554.9 289.6,502.08 289.6,474.58 U1.6
NetC11_2: C11.2 R4.1 | length 63.7
  Bottom Layer w10: R4.1@1392.7,205.9 1393.1,205.5 C11.2@1456.2,205.5
NetC20_1: C20.1 R7.2 U2.4 | length 123.5
  Bottom Layer w10: C20.1@1263.9,281.4 R7.2@1314.1,281.4 ; R7.2@1328.1,292.88 1340.8,305.58 U2.4
  Bottom Layer w15: R7.2@1314.1,281.4 R7.2
NetC21_1: C21.1 R9.2 R10.2 U3.3 | length 222.3
  Bottom Layer w10: C21.1 1227.8,506.7 R10.2 1270,565.6 1294.6,590.2 R9.2 1284.8,604 1260.1,604 1249.4,614.7 1249.4,632.16 1245.21,636.35 U3.3@1241.9,636.35
NetC23_2: C23.2 C24.2 R21.1 U5.8 U5.13 | length 542.6
  Top Layer w12: R21.1 898.7,565.8 C23.2 ; U5.13 928.87,518.63 907.8,539.7 907.8,556.7 C23.2 ; U5.8 U5.8 1037.8,384.9 1056.8,403.9 1056.8,507.09 1048.39,515.5 983.59,515.5 963.46,535.63 963.46,560.14 957.9,565.7 C23.2
NetC25_2: C25.2 U5.20 | length 155.3
  Top Layer w10: C25.2@760.7,573.4 760.7,461.57 778.19,444.08 796.85,444.08 U5.20
NetC26_2: C26.2 U5.10 | length 111.7
  Top Layer w10: U5.10 962.46,424.24 1006.43,424.24 1027.8,445.61 C26.2
NetC27_2: C27.2 C32.2 R22.2 U4.2 | length 204.7
  Bottom Layer w20: U4.2@734.74,129.8 732.57,127.63 732.57,41.7 733.43,40.84 733.43,-11.54 738.43,-16.54 R22.2 ; C27.2@748.17,43 C32.2@799.27,43
NetD1_2: D1.2 R16.2 | length 62.2
  Bottom Layer w10: R16.2 56.9,556 D1.2
NetD2_2: D2.2 R17.2 | length 102.4
  Bottom Layer w10: D2.2 142.3,77.1 167.18,52.22 167.18,39.37 174.25,32.3 200.8,32.3 210.8,22.3 R17.2
NetD3_2: D3.2 R18.2 | length 62.8
  Bottom Layer w10: R18.2 83.4,236.3 D3.2
NetD4_2: D4.2 P5.2 Q1.3 | length 206.6
  Top Layer w30: P5.2 1397.26,-9.94 1397.26,12.56 1446.7,62 1446.7,66 D4.2
  Top Layer w35: Q1.3 1359.1,64.3 1361.6,61.8 1361.6,21.11 1391.7,-8.99 P5.2
NetD5_2: D5.2 P6.2 Q2.3 | length 208.3
  Top Layer w30: D5.2 1788.6,622.2 1846.64,564.16 1867.04,564.16 P6.2
  Top Layer w35: Q2.3 1844.29,536.8 1866.09,558.6 P6.2
NetD6_2: D6.2 P7.2 Q3.3 | length 207
  Top Layer w20: Q3.3@1257.1,767.5 Q3.3@1261.3,763.3
  Top Layer w30: P7.2 1283.46,844.34 1283.46,822.14 D6.2@1341.6,764
  Top Layer w35: Q3.3@1257.1,767.5 1255.2,769.4 1255.2,809.3 1273.3,827.4 1273.3,838.79 P7.2@1279.81,845.3
NetD7_2: D7.2 P8.2 Q4.3 | length 214.4
  Top Layer w30: D7.2 1788.1,286.6 1792.1,286.6 P8.2@1851.17,227.53 ; P8.2@1851.21,227.53 1865.74,213 P8.2
  Top Layer w35: Q4.3 1791.2,194 1793.7,191.5 1845.59,191.5 1867.09,213 P8.2
NetL2_2: L2.2 R4.2 U2.1 U2.2 | length 99.8
  Bottom Layer w10: R4.2 1411.46,279.16 1411.46,298.06 1440.8,327.4 U2.2
NetQ1_1: Q1.1 R23.2 R27.2 | length 128.5
  Top Layer w10: Q1.1 1385.1,165.19 R23.2 1454.2,212.7 R27.2
NetQ2_1: Q2.1 R24.2 R28.2 | length 130.1
  Top Layer w10: R28.2 1636.2,641.6 R24.2 1690.21,571.2 Q2.1
NetQ3_1: Q3.1 R25.2 R29.2 | length 118.2
  Top Layer w10: Q3.1 1214.2,670.41 R25.2@1214.2,562.8
NetQ4_1: Q4.1 R26.2 R30.2 | length 151.9
  Top Layer w10: R30.2 1599.8,304.1 1628.8,275.1 1628.8,241.2 R26.2 1694.41,231.2 Q4.1
NetR5_1: R5.1 U2.7 | length 160.1
  Bottom Layer w10: U2.7 1440.8,543.51 1446.24,538.07 1446.24,534.56 1465.8,515 1552.1,515 R5.1
NetR6_1: R6.1 R8.2 U2.6 | length 149.9
  Bottom Layer w10: R8.2@1365.3,712 1365.3,650.8 1365,650.5 1369,650.5 1390.8,628.7 U2.6
NetR12_2: R12.2 U5.23 | length 90.4
  Top Layer w10: R12.2 749.01,399.9 763.96,384.95 U5.23
NetR15_2: R15.2 U5.24 | length 93.6
  Top Layer w10: R15.2 742.9,341.6 766.56,365.26 U5.24
NRST: C9.2 P2.1 R2.2 S1.4 U1.4 | length 1268.9
  Top Layer w10: C9.2 113.9,734.7 123.9,724.7 R2.2 130.7,720.7 v1(165.5,720.7) ; v1(286.73,575.66) 302.7,559.7 329.07,533.33 U1.4 ; v1(497.7,336) 500.38,333.32 511.38,333.32 663.27,181.43 663.27,162.01 S1.4 667.61,138.8 627.7,138.8 548.5,59.6 P2.1
  POWER w10: v1(286.73,575.66) 497.7,364.7 v1(497.7,336)
  Bottom Layer w10: v1(165.5,720.7) 286.73,599.47 v1(286.73,575.66)
OSCIN: C7.2 U1.2 Y1.2 | length 256.8
  Top Layer w10: U1.2 368.44,566.34 377.8,575.7 377.8,596.3 387.8,606.3 395.1,606.3 405.1,616.3 405.1,670.99 Y1.2
OSCOUT: C8.2 U1.3 Y1.1 | length 254.4
  Top Layer w10: Y1.1 312.9,671.4 312.9,617.5 C8.2 326.9,607.5 336.9,597.5 336.9,575.4 348.75,563.55 U1.3
PWM1: R24.1 U1.13 | length 1701.1
  Top Layer w10: v1(116.75,398.73) 119.45,398.73 137.19,380.99 U1.13 ; v1(1092.2,492.2) 1626.2,492.2 1636.2,502.2 R24.1
  Bottom Layer w10: v1(116.75,398.73) 116.75,451.05 148.51,482.8 439.25,482.8 450.35,493.9 565.45,493.9 586.43,472.92 985.81,472.92 1005.09,492.2 v1(1092.2,492.2)
PWM2: R25.1 U1.14 | length 1480.8
  Top Layer w10: v1(96.02,375.01) 99.81,375.01 113.52,361.3 U1.14 ; v1(1092.4,557.1) 1092.53,557.1 1121.13,528.5 1258.6,528.5 1268.06,537.96 1268.06,552.1 1278.06,562.1 R25.1
  Bottom Layer w10: v1(96.02,375.01) 96.02,378.8 80.13,394.69 80.13,458.93 172.36,551.16 292.23,551.16 292.47,551.4 725.67,551.4 745.09,570.81 1078.69,570.81 v1(1092.4,557.1)
PWM3: R23.1 U1.15 | length 1724.1
  Top Layer w10: U1.15 93.25,341.62 47.38,295.74 47.38,114.18 99.95,61.6 v1(283.1,61.6) ; v1(587.1,40.3) 1118.91,40.3 1281.31,202.7 1310.1,202.7 R23.1
  POWER w10: v1(283.1,61.6) 304.4,40.3 v1(587.1,40.3)
PWM4: R26.1 U1.16 | length 1631.8
  Top Layer w10: v1(136.2,305.34) 138.88,308.01 146.61,308.01 160.53,321.93 U1.16 ; v1(1212.48,307.29) 1213.62,306.15 1481.95,306.15 1607.9,180.2 1628.8,180.2 1638.8,170.2 R26.1
  Bottom Layer w10: v1(136.2,305.34) 1053.74,305.34 1054.55,306.15 1127.68,306.15 1128.63,305.2 1210.39,305.2 v1(1212.48,307.29)
RST: U1.23 U4.1 | length 678.2
  Top Layer w10: U1.23 309.38,196.11 313.7,191.79 v1(313.7,188)
  Bottom Layer w10: v1(313.7,188) 380.07,254.37 508.28,254.37 508.47,254.17 771.43,254.17 800.43,225.17 800.43,142.85 U4.1@805.86,137.42
RXD: U1.21 U4.4 | length 588.1
  Top Layer w10: v1(254.6,122.4) 253.64,123.36 253.64,185.15 270.01,201.52 U1.21
  Bottom Layer w10: v1(254.6,122.4) 256.95,122.4 355.55,23.8 552.84,23.8 558.7,29.66 558.7,111.24 U4.4@577.26,129.8
SCL: R11.2 R12.1 U1.34 | length 283.5
  Top Layer w10: U1.34 646.93,400.67 R12.1 647.7,456.8 R11.2
SDA: R14.2 R15.1 U1.33 | length 303.5
  Top Layer w10: U1.33 526.71,380.99 556.8,350.9 638.8,350.9 R15.1 648.1,280.05 R14.2
SWCLK: P2.2 U1.28 | length 379.4
  Top Layer w10: U1.28 458.34,282.56 490.6,250.3 490.6,11.8 P2.2
SWDIO: P2.4 U1.25 | length 325.7
  Top Layer w10: P2.4 344.4,65.6 344.4,140.82 355.7,152.12 355.7,207.33 349.66,213.37 349.66,247.21 U1.25
TXD: U1.22 U4.5 | length 431.6
  Top Layer w10: U1.22 289.7,196.46 276.09,182.85 276.09,158.64 292.15,142.58 v1(292.15,138.79)
  Bottom Layer w10: v1(292.15,138.79) 294.83,136.11 294.83,128.19 370.72,52.3 474.04,52.3 479.9,58.16 479.9,111.18 U4.5@498.52,129.8
USART2_RX: P4.2 U1.10 | length 399.4
  Top Layer w10: P4.2@-18.3,216.9 P4.2@-9.8,216.9 ; P4.2 -14.24,237.46 -14.24,275.56 38.23,328.03 38.23,385.43 122.2,469.4 185.1,469.4 196.19,458.31 U1.10
USART2_TX: P4.3 U1.9 | length 356.7
  Top Layer w10: P4.3 -18.3,333.6 -18.3,380.6 91.4,490.3 223.88,490.3 224.02,490.16 229.74,490.16 230.64,489.25 U1.9
VCC_3.3V: C1.2 C2.2 C3.2 C4.2 C10.2 C16.2 C17.1 C18.1 D1.1 D2.1 D3.1 L1.2 P2.5 R2.1 R11.1 R14.1 R21.2 R22.1 U1.1 U1.19 U1.27 U3.5 | length 3327
  Top Layer w12: v1(202.7,127.5) 202.89,127.69 202.89,157.16 211.89,166.16 C3.2 ; C3.2@216.4,168.7 207.86,177.24 207.86,225.33 216.56,234.03 230.55,234.03 230.64,234.12 U1.19 ; U1.27 388.12,262.21 388.22,262.3 426.17,262.3 456.21,232.27 v1(456.21,229.87) ; C4.2@447.9,175.6 C4.2@448.9,174.6
  Top Layer w15: U1.1@389.72,474.49 416.69,474.49 443.6,501.4 C2.2 504,501.4 528,525.4 C1.2 ; v1(456.21,229.87) 457.65,228.42 457.65,176.25 C4.2
  Top Layer w20: v1(15.8,662.6) 16.88,662.6 19.18,664.9 L1.2 ; v1(28.9,725) 29.05,724.85 61.55,724.85 R2.1 ; v1(76.71,43.2) 77.8,43.2 89.54,31.46 C10.2@128.31,31.46 ; C10.2 125.01,26.06 130.01,21.06 130.01,-6.56 148.5,-25.06 P2.5 ; C1.2 528.65,561.35 528.65,601.05 v1(529.3,601.7) ; R14.1 713.82,279.32 752.35,279.32 v1(753,278.67) ; R11.1 713.9,458 713.9,502.8 v1(714.3,503.2) ; v1(796.9,624.8) 797.67,625.57 834.3,625.57 839.3,630.57 R21.2 R21.2 839.35,674.25 v1(838.9,674.7)
  POWER w20: 118.6,623.4 118.6,534.65 211.83,441.41 211.83,323.1 305.07,229.87 v1(202.7,127.5) ; v1(529.3,601.7) 598.53,670.93 834.05,670.93 837.82,674.7 v1(838.9,674.7) ; 561.79,262.01 653.9,169.9 653.9,-26.6 ; 662.95,365.95 665.72,365.95 v1(753,278.67)
  POWER w30: 305.07,229.87 v1(456.21,229.87) 529.64,229.87 561.79,262.01 665.72,365.95 ; 662.95,365.95 662.95,451.75 714.3,503.1 v1(714.3,503.2) 714.4,503.2 815.2,604
  POWER w40: 815.2,604 851.4,604
  Bottom Layer w20: v1(62.73,359.44) 62.73,358.36 75.37,345.72 75.37,320.4 85.37,310.4 D3.1 ; v1(71.9,124.3) 72.1,124.1 72.1,79.8 D2.1 ; D1.1 127.25,618.15 172.05,618.15 v1(172.4,618.5) ; v1(631.8,-36.79) 632.57,-36.02 632.57,-31.86 648.31,-16.12 R22.1@683.39,-16.12 ; v1(660,-48.1) 660.77,-47.33 673.8,-47.33 R22.1@673.8,-29.78
  other v1: 693.6,-50.1 1094.4,678.4 1121.4,715.49 1071.8,720.8 964.2,723.2 1021.5,724.4
VCC_5V: C13.1 C14.2 C15.2 C19.2 R6.2 R9.1 U2.8 U3.1 | length 469.3
  Bottom Layer w10: U3.1 1232.73,716.65 1257.3,716.65 1257.8,717.14 1257.8,716 1284.6,689.2 1284.6,669.2 R9.1 ; R6.2 1497.5,646 C19.2
  Bottom Layer w30: 1228.9,756.2 1253.7,781 ; C13.1@1481.8,781 C13.1
  Bottom Layer w40: 1253.7,781 C13.1@1481.8,781
VCC_BAT: C12.2 C28.2 C29.2 C30.2 C31.2 D4.1 D5.1 D6.1 D7.1 L2.1 P1.2 P5.1 P6.1 P7.1 P8.1 R7.1 R13.2 U2.3 | length 4118.1
  Top Layer w20: v1(1272.7,431) 1273.78,431 1275.98,428.8 1314.7,428.8 R13.2 ; C28.2 C28.2@1516.3,126.7 ; C29.2@1722.5,704.63 1727.5,699.63 C29.2 ; C30.2 C30.2@1729.6,359 ; D5.1 D5.1@1789.63,692.23
  Top Layer w30: P7.1@1390.9,845 1405.43,830.47 D6.1@1405.43,773.27 ; D6.1 1478.5,765 1478.8,765.3 C31.2 ; P5.1 1491.7,46 1511.7,66 D4.1 C28.2 ; C29.2 1727.5,696.2 1732.5,691.2 D5.1 1840,691.2 P6.1 ; C30.2 1788.1,355 D7.1 1831,355.6 P8.1
  POWER w20: P1.2 v1@1272.7,428.86
  POWER w40: P7.1 1387.43,840.37 1425.73,840.37 1502.4,763.7 1502.4,342.3 ; P5.1 1491.7,182.06 1541.76,232.13 1541.76,342.3 ; P6.1 1867.6,653.6 1813.7,653.6 1502.4,342.3 ; P8.1 1724.2,313 1694.9,342.3 1541.76,342.3 ; 1502.4,342.3 1541.76,342.3
  POWER w55: P1.2 1122.41,257.55 1417.65,257.55 1502.4,342.3
  Bottom Layer w10: 1252.09,131.69 1259.39,131.69 ; U2.3@1390.8,327.3 U2.3
  Bottom Layer w15: 1259.39,131.69 1310.6,182.9 1310.6,204.9 R7.1 ; R7.1@1330.6,210.5 1357,236.9 1357,293.5 U2.3@1390.8,327.3
  Bottom Layer w30: P1.2 1165.51,214.45 1165.51,212.8 1248.53,129.78 1250.18,129.78 1325.16,54.8 1626.68,54.8 1629.88,58 C12.2 ; L2.1@1636.59,138.7 L2.1@1657.8,138.7
pads on no net: P1.0 P1.3 S1.3 U1.7 U1.30 U1.31 U3.4 U5.2 U5.3 U5.4 U5.5 U5.6 U5.7 U5.14 U5.15 U5.16 U5.17 U5.19 U5.21 U5.22
copper on no net: | length 1.3
  Top Layer w10: 422.57,321.93 423.48,322.84

## Polygon pours and split planes (outlines as drawn)
GND on Bottom Layer "Top Layer-No Net" (solid, remove dead copper, pour order 18): -395.3,823.2 -121.9,1096.6 241.5,1096.6 2169.6,1096.6 2274,992.2 2306.4,959.8 2306.4,718.8 2306.4,-76.2 2180.5,-202.1 2144.5,-238.1 1849.5,-238.1 -143.5,-238.1 -398.9,17.3
VCC_BAT on Bottom Layer "VCC_BAT_L04_P024" (solid, remove dead copper, pour order 24): 1614.27,17.13 1587.7,43.7 1587.7,208.4 1599.6,220.3 1718.9,220.3 1733.2,206 1733.2,115.2 1691.4,73.4 1691.4,37.6 1670.26,16.46
VCC_5V on Bottom Layer "VCC_5V_L04_P030" (solid, remove dead copper, pour order 30): 1243.8,796.4 1227.3,812.9 1143.9,812.9 1133.9,802.9 1133.9,760.6 1170.7,760.6 1189.5,741.8 1189.5,705 1197.1,697.4 1254.07,697.4 1266.6,709.93 1266.6,775.2
VCC_3.3V on Bottom Layer "VCC_3.3V_L04_P032" (solid, remove dead copper, pour order 32): 1094.4,780.3 1078.8,795.9 939.1,795.9 928.1,784.9 928.1,723.3 943.9,707.5 1023.6,707.5 1070.9,660.2 1131.35,660.2 1150.6,680.56 1150.6,721.3 1128.6,743.3
VCC_5V on Bottom Layer "VCC_5V_L04_P028" (solid, remove dead copper, pour order 28): 1556,828.9 1556,845.5 1537.6,863.9 1458.5,863.9 1447.6,853 1447.6,757.2 1472.8,732 1472.8,536.5 1483.2,528.7 1485.8,528.7 1503.1,528.7 1516.1,541.7 1516.1,599.3 1553.5,636.7 1553.5,738.3
NetL2_2 on Bottom Layer "NETL2_2_L04_P026" (solid, remove dead copper, pour order 26): 1745.9,413.6 1745.9,430.3 1722.3,453.9 1595.1,453.9 1542.5,401.3 1436.3,401.3 1423.1,388.1 1423.1,310.3 1423.5,309.9 1710,309.9 1744.9,344.8
GND on Top Layer "Top Layer-No Net" (solid, remove dead copper, pour order 22): -290.5,896.2 -74.6,1112.1 306.6,1112.1 2058.5,1112.1 2173.7,996.9 2216.9,953.7 2216.9,705.5 2216.9,-150.7 2127,-240.6 2047.9,-319.7 1767.2,-319.7 -135.8,-319.7 -290.5,-165
GND on Top Layer "GND_L01_P038" (solid, remove dead copper, pour order 38): 1674.08,170.87 1674,170.95 1674,184.85 1676.35,187.2 1738.8,187.2 1773.45,152.55 1773.45,120.95 1761.7,109.2 1681.85,109.2 1674.38,116.67
GND on Top Layer "GND_L01_P036" (solid, remove dead copper, pour order 36): 1332.9,180.9 1346.2,180.9 1346.2,136.3 1360.5,122 1360.5,104.3 1351.9,95.7 1351.7,95.9 1303.5,95.9 1284.5,114.9 1284.5,175 1289.18,179.68
GND on Top Layer "GND_L01_P035" (solid, remove dead copper, pour order 35): 1668.8,510.3 1668.8,526.7 1669.7,526.7 1675.9,532.9 1743.5,532.9 1753.9,522.5 1751.5,520.1 1751.5,474.4 1744.1,467 1678.6,467 1667.9,477.7
GND on Top Layer "GND_L01_P033" (solid, remove dead copper, pour order 33): 1263.6,601.9 1248.2,617.3 1248.2,701.7 1259.4,712.9 1346.9,712.9 1369.5,690.3 1369.5,617 1354.9,602.4
VCC_3.3V on POWER "VCC_3.3V_L03_P045" (solid, remove dead copper, pour order 45): 639.19,-6.06 694.01,-6.06 715,-27.05 715,-59.35 705.8,-68.55 639.42,-68.55 623.22,-57.09 616.41,-50.28 616.41,-28.84
VCC_3.3V on POWER "VCC_3.3V_L03_P044" (solid, remove dead copper, pour order 44): -1,644 -1,726.5 13.3,740.8 40,740.8 57.9,722.9 57.9,672.6 92.9,637.6 176.9,637.6 188.4,626.1 188.4,609.7 173.1,594.4 48.6,594.4
VCC_3.3V on POWER "VCC_3.3V_L03_P043" (solid, remove dead copper, pour order 43): 228,115.5 199.2,86.7 186.8,86.7 131.7,31.6 131.7,11.5 123.1,2.9 100.1,2.9 47.9,55.1 45.1,331.2 43.8,332.5 43.8,361.9 58.8,376.9 69.8,376.9 83.5,363.2 83.5,216.7 147.5,152.7 214.7,152.7 228,139.4
VCC_3.3V on POWER "VCC_3.3V_L03_P040" (solid, remove dead copper, pour order 40): 781.5,666 925,798.5 1109.3,798.5 1151.1,756.7 1151.1,651.3 1064.8,565 791.8,565 777.3,579.5
GND on GND "Top Layer-No Net" (solid, remove dead copper, pour order 20): -285.3,921.7 -123.4,1083.6 308.3,1083.6 2006.2,1083.6 2085.4,1004.4 2132.2,957.6 2132.2,731 2132.2,-78.4 1988.3,-222.3 1941.5,-269.1 1729.3,-269.1 -170.1,-269.1 -292.5,-146.7

## Keep-outs
Keep-Out Layer:
  rectangle: 359.2,764.9 873.5,907.6
  lines w5: 1888.8,905.8 cw(c1888.25,825.55) 1968.5,825 1968.5,-11.9 cw(c1897.1,-7.6) 1892.8,-79 3,-79 cw(c-1.2,-1.5) -78.7,-5.7 -78.7,821.3 cw(c4.15,822.95) 2.5,905.8 1891.6,905.8

## Other copper
Top Layer:
  pour cut-out: 381.4,484.8 382.71,486.11 473.5,486.11 473.5,498.99 512.71,538.2 511.8,539.11 511.8,569.5 366.38,569.5 359.98,575.9
  pour cut-out: 458.81,302.24 476.55,284.5 566.3,284.5 656.4,194.4 627.7,165.7 627.7,138.8 626.7,138.8 548.5,60.6 548.5,-30.3 541.1,-30.3 519.5,-51.9 508.39,-40.79 473.83,-40.79 473.83,4.23 508.8,39.2 501.62,46.38 501.62,268.1 465.9,268.1 464,266.2
  pour cut-out: 1339.55,180.9 1340.11,180.9 1346.73,174.28 1346.73,180.37 1346.2,180.9

## Silkscreen, mask and mechanical layers (free items; w line width, h text height)
Top Overlay:
  lines w8: 696.6,768.6 926.9,768.6 895.8,799.7 ; 895,737.1 926.5,768.6
  text "VCC" at 1434.99,832.52 h25
  text "机头" at 736.9,791.7 h80
  text "VCC" at 1842.92,717.61 h25
  text "VCC" at 1841,375.6 h25
  text "VCC" at 1551.9,-34.5 h25
  text "VCC" at 1207.4,-54.5 h25
  text "GND" at 943.7,-56.5 h50
Bottom Overlay:
  text "Jiejie" at 288.6,397.8 h90
Mechanical 1:
  lines w5: -78.74,0.64 -78.74,822.4 ; -78.54,1.5 ccw(c3.51,2.95) 4.77,-79.1 ; -78.54,822.4 cw(c3.51,823.65) 2.06,905.7 ; 2.06,905.51 1889.19,905.51 ; 1885.06,905.5 cw(c1886.32,823.45) 1968.37,824.9 ; 1895.12,-78.74 ccw(c1894.31,-4.55) 1968.5,-3.74 1968.5,189.1 1968.5,826.2